# EAGLE board projekt (EAGLE 7.7.0)
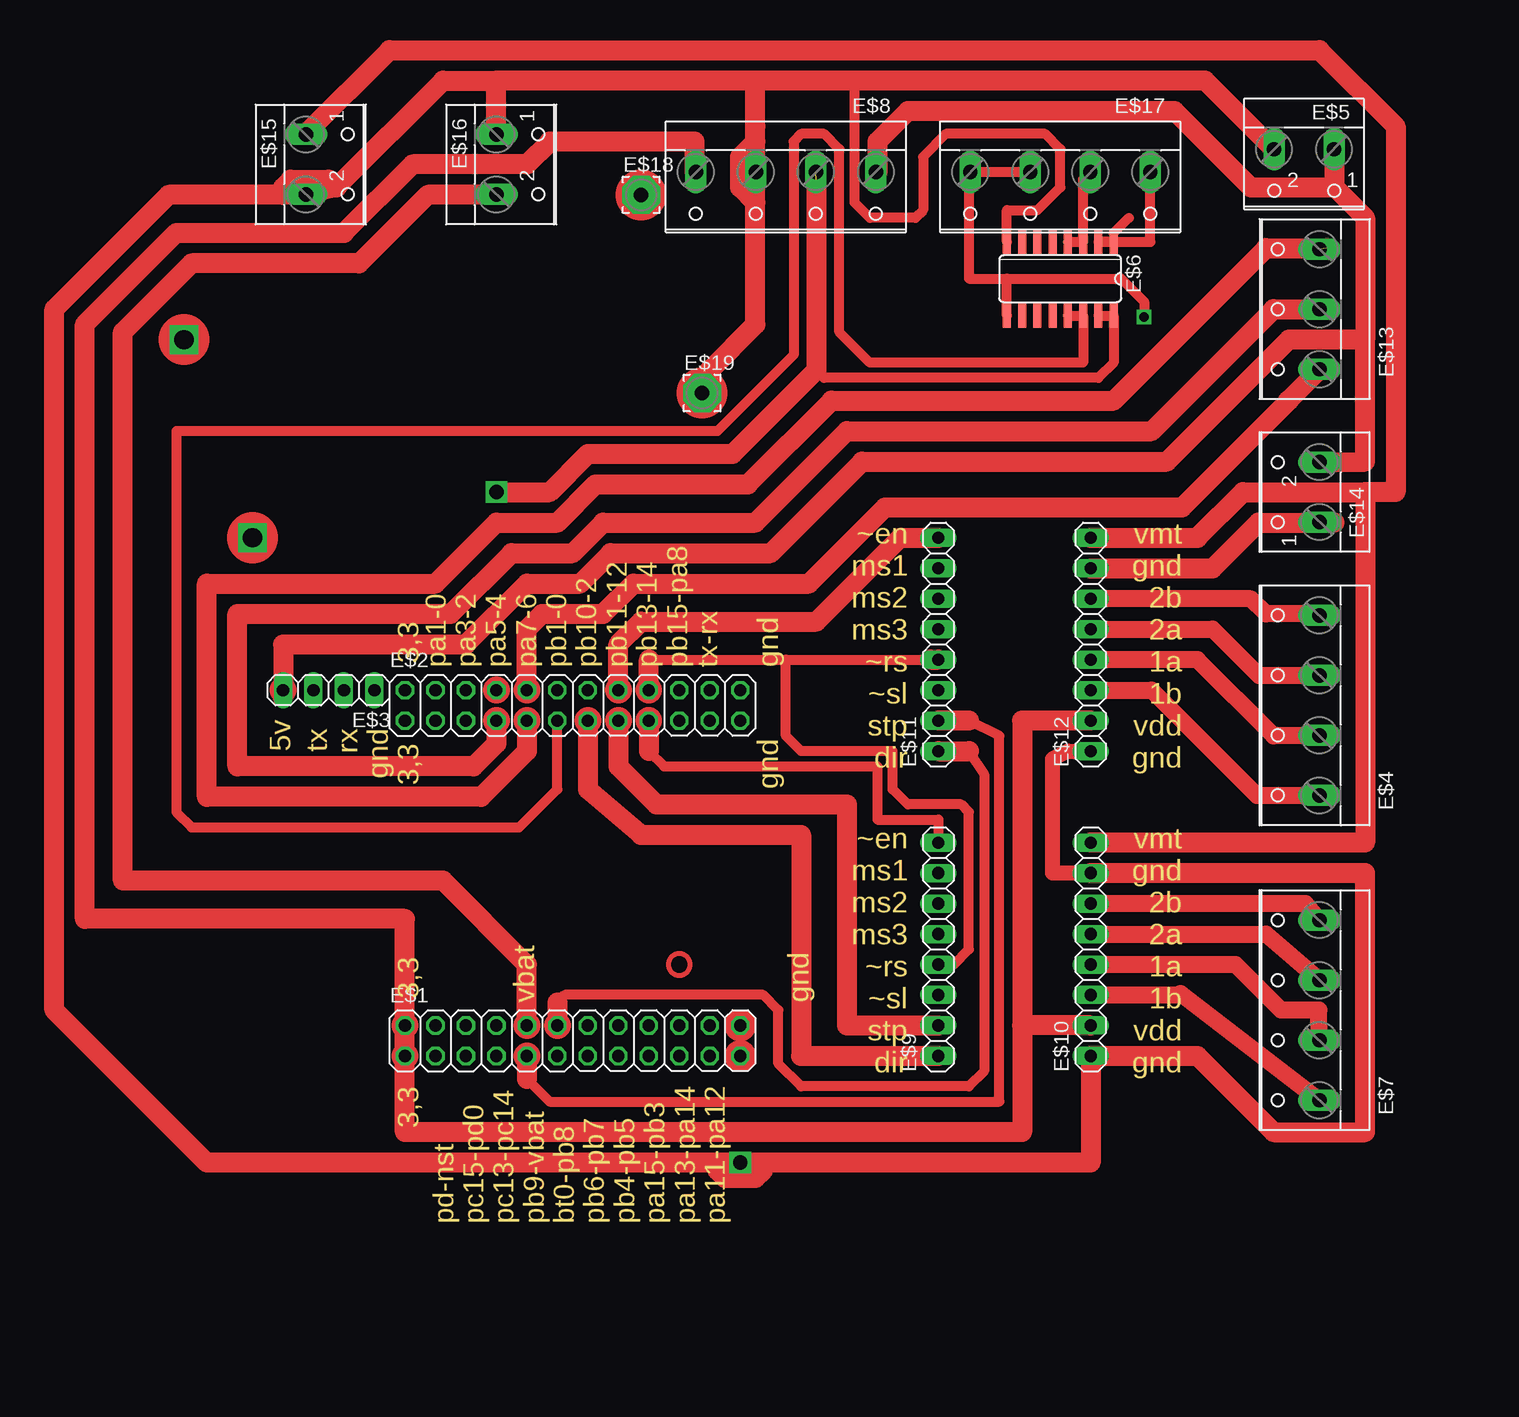
[diagram p0: board, top side]
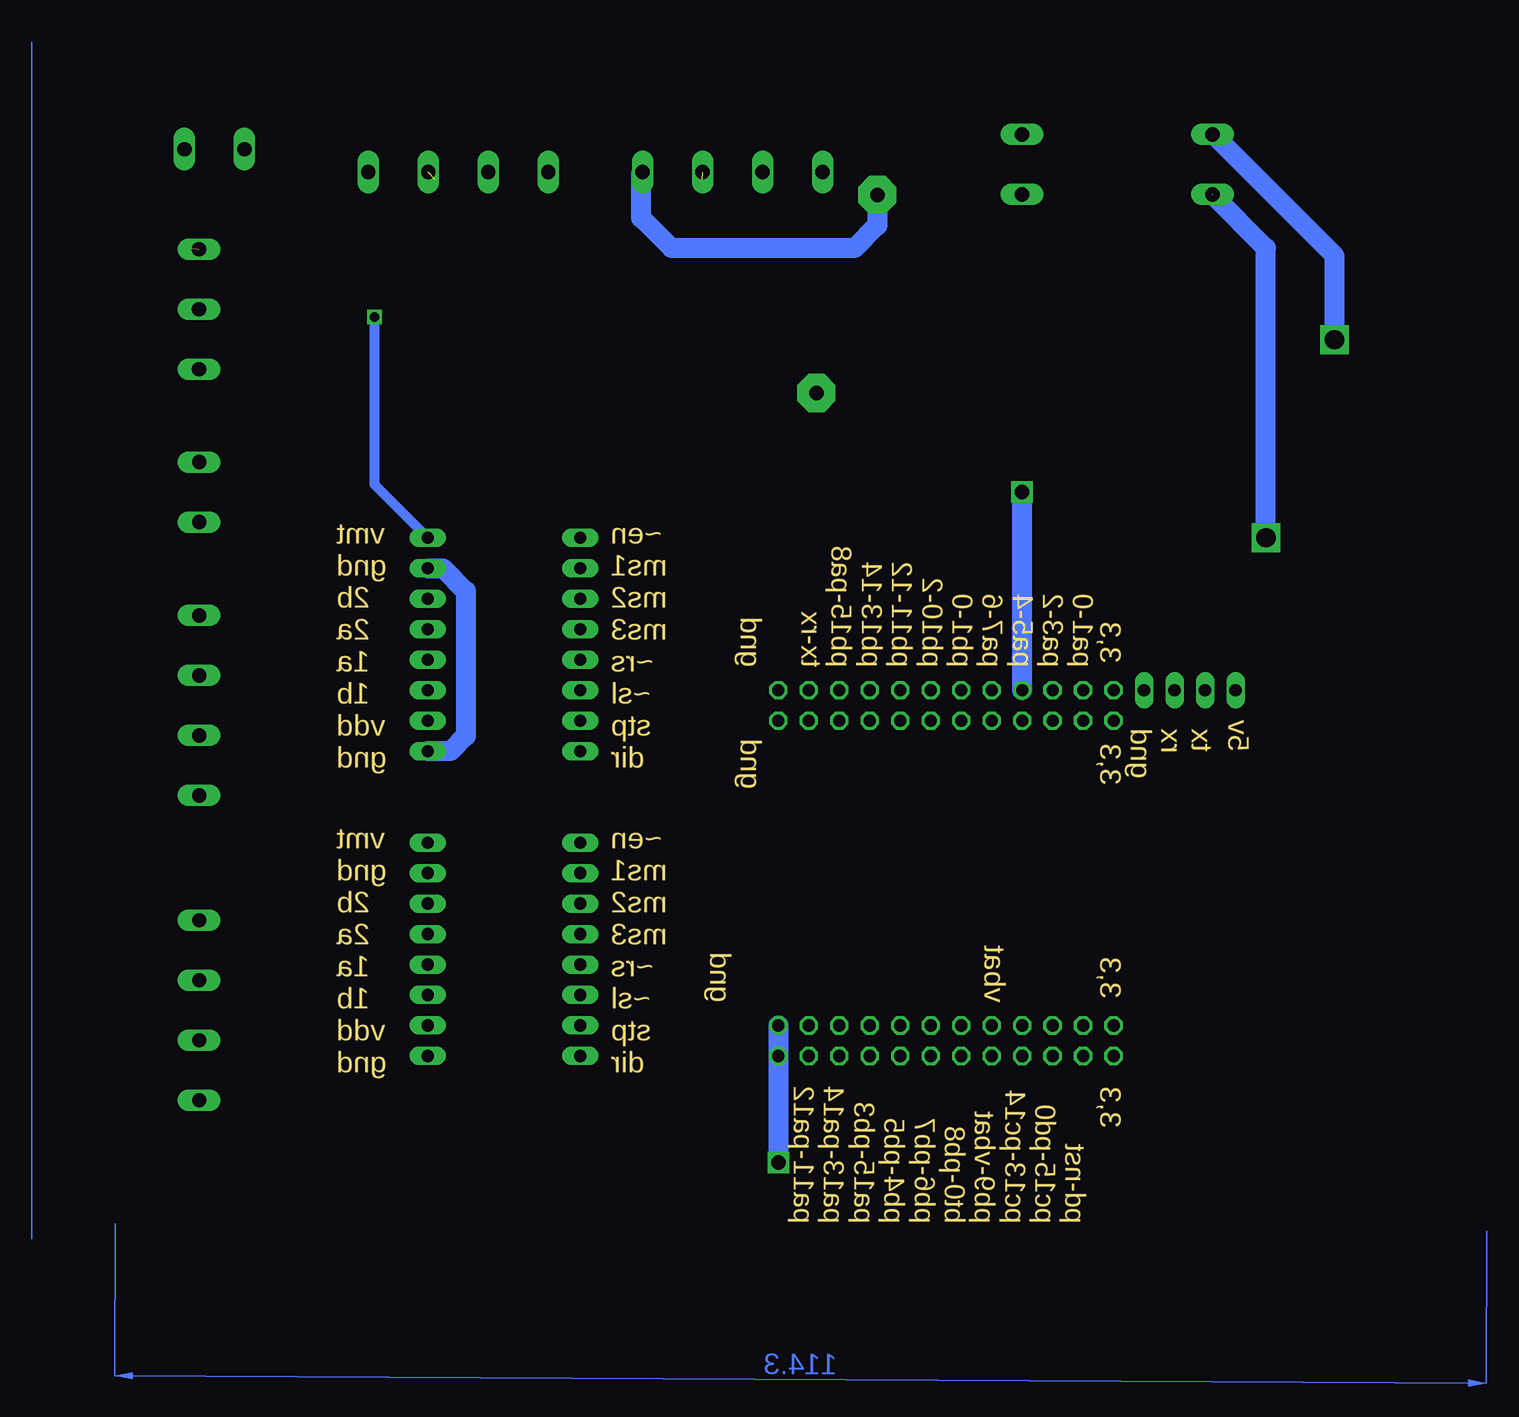
[diagram p1: board, bottom side, seen from below]

No outline drawn. Coordinates in mm, seen from the top.
Copper layers (1*16): Top 0.035mm / dielectric 1.5mm / Bottom 0.035mm
Design rules "default": minimum track width 10mil, minimum drill 24mil, track to track 8mil, track to pad 8mil, pad to pad 8mil, via to via 8mil, smd to smd 8mil, copper to edge 40mil, drill to drill 8mil, minimum pad ring 10mil, minimum via ring 8mil, stop-mask expansion 4mil, vias tented up to drill 0mil, thermal gap 10mil

## Footprints (pad centres in the part's own frame; a part is rotated, then mirrored left to right if it is on the bottom)
2X12 = drill 1.016 octagon: 1 -13.97,-1.27; 2 -13.97,1.27; 3 -11.43,-1.27; 4 -11.43,1.27; 5 -8.89,-1.27; 6 -8.89,1.27; 7 -6.35,-1.27; 8 -6.35,1.27; 9 -3.81,-1.27; 10 -3.81,1.27; 11 -1.27,-1.27; 12 -1.27,1.27; 13 1.27,-1.27; 14 1.27,1.27; 15 3.81,-1.27; 16 3.81,1.27; 17 6.35,-1.27; 18 6.35,1.27; 19 8.89,-1.27; 20 8.89,1.27; 21 11.43,-1.27; 22 11.43,1.27; 23 13.97,-1.27; 24 13.97,1.27
1X04 = drill 1.016 long: 1 -3.81,0; 2 -1.27,0; 3 1.27,0; 4 3.81,0
W237-4 = drill 1.194 long: 1 -7.5,-1.27; 2 -2.5,-1.27; 3 2.5,-1.27; 4 7.5,-1.27
W237-102 = drill 1.194 long: 1 -2.5,-1.27; 2 2.5,-1.27
SO16 = smd 0.66 x 2.032: 1 -4.445,-3.073; 2 -3.175,-3.073; 3 -1.905,-3.073; 4 -0.635,-3.073; 5 0.635,-3.073; 6 1.905,-3.073; 7 3.175,-3.073; 8 4.445,-3.073; 9 4.445,3.073; 10 3.175,3.073; 11 1.905,3.073; 12 0.635,3.073; 13 -0.635,3.073; 14 -1.905,3.073; 15 -3.175,3.073; 16 -4.445,3.073
1X08 = drill 1.016 long: 1 -8.89,0; 2 -6.35,0; 3 -3.81,0; 4 -1.27,0; 5 1.27,0; 6 3.81,0; 7 6.35,0; 8 8.89,0
W237-103 = drill 1.194 long: 1 -5,-1.29; 2 0,-1.29; 3 5,-1.29
3,17/1,2 = drill 1.194 pad 3.175 octagon: 1 0,0

## Placement (x,y rotation side)
E$1  [2X12]  25.4,5.08 0 top
E$2  [2X12]  25.4,33.02 0 top
E$3  [1X04]  5.08,34.29 180 top
E$4  [W237-4]  86.36,33.02 90 top
E$5  [W237-102]  86.36,78.11 180 top
E$6  [SO16]  66.04,68.58 180 top
E$7  [W237-4]  86.36,7.62 90 top
E$8  [W237-4]  43.18,76.2 180 top
E$9  [1X08]  55.88,12.7 90 top
E$10  [1X08]  68.58,12.7 90 top
E$11  [1X08]  55.88,38.1 90 top
E$12  [1X08]  68.58,38.1 90 top
E$13  [W237-103]  86.36,66.04 90 top
E$14  [W237-102]  86.36,50.8 90 top
E$15  [W237-102]  4.45,78.11 270 top
E$16  [W237-102]  20.32,78.11 270 top
E$17  [W237-4]  66.04,76.2 180 top
E$18  [3,17/1,2]  31.11,75.56 0 top
E$19  [3,17/1,2]  36.2,59.05 0 top

## Library data of the parts
E$1-E$3 E$9-E$12 = pinhead
E$4 E$5 E$7 E$8 E$13-E$17 = con-wago-500
E$6 = 40xx
E$18 E$19 = wirepad

## Nets
5V: E$3.4 E$5.1 E$14.2
+12V: E$6.9 E$10.8 E$12.8 E$15.1 E$17.3 E$17.4
GND: E$1.23 E$1.24 E$5.2 E$6.8 E$8.3 E$10.1 E$10.7 E$12.1 E$12.7 E$14.1 E$15.2
LED: E$2.8 E$6.15 E$6.16 E$8.2
S$1: E$2.11 E$6.13 E$6.14
S$2: E$7.1 E$10.3
S$3: E$7.2 E$10.4
S$4: E$7.3 E$10.5
S$5: E$7.4 E$10.6
S$6: E$4.1 E$12.3
S$7: E$4.2 E$12.4
S$8: E$4.3 E$12.5
S$9: E$4.4 E$12.6
S$10: E$1.9 E$11.2
S$11: E$2.16 E$11.8
S$12: E$2.10 E$13.1
S$13: E$2.9 E$13.3
S$14: E$6.1 E$6.2 E$17.1
S$15: E$6.3 E$6.4 E$17.2
S$17: E$2.18 E$9.4 E$11.4
S$18: E$1.12 E$11.1
S$19: E$2.7 E$13.2
S$20: E$2.13 E$9.1
S$21: E$2.15 E$9.2
S$22: E$2.17 E$9.8
S$25: E$1.1 E$1.2 E$10.2 E$12.2
S$26: E$8.1 E$18.1
VBAT: E$1.10

## Tracks (layer width: path | path; a pad name or v marks a point on that pad's centre or on a via)
5V
  Top 1.676: 1.27,33.66 E$3.4 1.27,38.1 16.51,38.1 21.59,43.18 26.04,43.18 28.57,45.72 41.91,45.72 49.53,53.34 74.93,53.34 85.09,63.5 91.44,63.5 | E$14.2 91.44,53.34 91.44,63.5 | E$5.1 88.86,76.24 88.9,76.2 | 88.9,76.2 91.44,73.66 91.44,63.5 | 88.9,76.2 81.92,76.2 75.56,82.55 53.34,82.55 50.8,80.01 50.8,77.47
+12V  (via drill 0.5)
  Top 0.813: E$17.4 E$17.3 58.42,77.47 58.42,68.58 61.59,68.58 | E$6.9 61.59,68.58 | 61.59,68.58 71.12,68.58 73.03,66.67 v73.03,65.41
  Top 1.676: E$12.8 77.47,46.99 81.28,50.8 91.44,50.8 | 91.44,50.8 91.44,21.59 E$10.8 | E$15.1 3.17,80.64 10.16,87.63 87.63,87.63 93.98,81.28 93.98,50.8 91.44,50.8
  Bottom 0.813: v73.03,65.41 73.03,51.44 E$12.8
GND  (via drill 1.2)  (1 unrouted)
  Top 0.813: E$8.3 40.68,81.24 40.64,81.28 | E$6.8 61.59,74.3 64.14,74.3 66.04,76.2 66.04,79.38 64.77,80.64 56.52,80.64 54.61,78.74 54.61,74.3 53.98,73.66 50.16,73.66 48.9,74.93 48.9,85.09
  Top 1.27: E$10.7 65.41,19.05 65.41,28.57 66.67,29.21 E$12.1
  Top 1.676: E$15.2 5.75,76.24 14.61,85.09 19.05,85.09 | 19.05,80.64 19.05,85.09 | 88.9,48.26 87.67,48.26 | 87.67,48.26 E$14.1 | 87.67,48.26 82.55,48.26 78.74,44.45 E$12.7 | E$5.2 83.82,79.38 78.11,85.09 48.9,85.09 40.64,85.09 | 40.64,85.09 19.05,85.09 | 40.64,85.09 40.64,81.28 40.64,80.01 | E$10.7 91.44,19.05 91.44,-2.54 83.82,-2.54 77.47,3.81 E$10.1 68.58,-5.08 v39.37,-5.08 -5.08,-5.08 -17.78,7.62 -17.78,66.04 -8.26,75.56 1.27,75.56 | 3.17,75.56 1.27,75.56 | 35.56,58.42 36.83,58.42 36.83,60.96 40.64,64.77 40.64,74.93 | 40.64,74.93 40.64,80.01 | 1.27,75.56 1.27,76.2 1.91,76.83 5.08,76.83 5.71,76.2 | 40.64,74.93 39.37,76.2 39.37,78.74 40.64,80.01
  Bottom 1.676: E$12.7 67.31,44.45 65.41,42.55 65.41,30.48 66.67,29.21 E$12.1 | E$1.23 E$1.24 v39.37,-5.08
LED  (via drill 1.2)  (1 unrouted)
  Top 0.813: E$6.15 E$6.16 70.48,61.59 69.22,60.33 46.35,60.33 45.72,60.96
  Top 1.676: v19.05,50.8 23.5,50.8 26.67,53.98 38.73,53.98 45.72,60.96 45.72,76.83
  Bottom 1.676: E$2.8 v19.05,50.8
S$1
  Top 0.813: E$6.13 E$6.14 67.94,61.59 50.16,61.59 47.62,64.14 47.62,79.38 46.35,80.64 44.45,80.64 43.81,80.01 43.81,62.23 37.47,55.88 -7.62,55.88 -7.62,24.13 -6.35,22.86 20.95,22.86 24.13,26.04 E$2.11
S$2
  Top 1.422: E$10.3 76.2,8.89 76.08,9.01 E$7.1
S$3
  Top 1.422: E$7.2 87.59,7.62 84.45,7.62 80.64,11.43 E$10.4
S$4
  Top 1.422: E$10.5 83.19,13.97 87.67,10.12 E$7.3
S$5
  Top 1.422: E$7.4 86.48,16.51 E$10.6
S$6
  Top 1.422: E$12.3 73.66,34.29 82.43,25.52 E$4.1
S$7
  Top 1.422: E$4.2 87.59,30.48 83.82,30.48 77.47,36.83 E$12.4
S$8
  Top 1.422: E$12.5 78.74,39.37 82.59,35.52 E$4.3
S$9
  Top 1.422: E$4.4 87.51,40.64 83.19,40.64 81.92,41.91 E$12.6
S$10
  Top 0.813: 21.59,1.91 23.5,0 60.96,0 60.96,30.48 58.42,31.75
  Top 1.676: E$1.9 21.59,1.91 | 58.42,31.75 E$11.2
S$11
  Top 1.676: E$2.16 29.21,38.1 31.11,40.01 45.72,40.01 52.7,46.99 E$11.8
S$12
  Top 1.676: E$2.10 21.59,39.37 22.86,40.64 27.94,40.64 30.48,43.18 45.09,43.18 51.44,49.53 76.2,49.53 85.09,58.42 85.03,58.42 E$13.1
S$13  (1 unrouted)
  Top 1.676: E$2.9 21.59,29.21 17.78,25.4 -5.08,25.4 -5.08,43.18 13.97,43.18 19.05,48.26 24.13,48.26 27.3,51.44 40.01,51.44 46.99,58.42 70.48,58.42 83.19,71.12 88.27,71.12
S$14
  Top 0.813: E$6.1 E$6.2 73.54,71.65 E$17.1
S$15  (1 unrouted)
  Top 0.813: E$6.4 E$6.3 67.94,76.83
S$16
  Top 1.676: 37.47,-5.71 38.1,-6.35 40.64,-6.35 41.27,-5.71
S$17
  Top 0.813: E$9.4 57.15,11.43 58.42,12.7 58.42,24.13 57.78,24.77 53.34,24.77 52.07,26.04 52.07,29.21 44.45,29.21 43.18,30.48 43.18,36.83 | 31.75,36.83 43.18,36.83 | 43.18,36.83 E$11.4
  Top 1.676: 55.24,36.83 E$11.4 | E$2.18 31.75,36.83
S$18
  Top 0.813: 58.42,29.21 59.69,27.3 59.69,2.54 58.42,1.27 44.45,1.27 42.55,3.17 42.55,7.62 41.27,8.89 24.77,8.89 24.13,8.26
  Top 1.676: E$11.1 58.42,29.21 | 24.13,8.26 E$1.12
S$19
  Top 1.676: E$2.7 19.05,29.84 17.14,27.94 -2.54,27.94 -2.54,40.64 15.24,40.64 20.32,45.72 25.4,45.72 27.94,48.26 40.64,48.26 48.26,55.88 73.66,55.88 83.82,66.04 E$13.2
S$20
  Top 1.676: E$2.13 26.67,26.04 31.11,22.23 44.45,22.23 44.45,3.81 E$9.1
S$21
  Top 1.676: E$2.15 29.21,27.94 32.38,24.77 48.26,24.77 48.26,6.35 E$9.2
S$22
  Top 0.813: 31.75,29.21 33.02,27.94 50.8,27.94 50.8,23.5 55.88,23.5 E$9.8
  Top 1.676: E$2.17 31.75,29.21
S$23
  Top 0.813: 70.48,72.39 71.75,73.66
S$24  (via drill 0.8)
  other vias: 73.03,65.41
S$25
  Top 1.676: 35.56,77.47 35.56,80.01 23.5,80.01 21.59,78.11 12.06,78.11 6.35,72.39 -7.62,72.39 -15.24,64.77 -15.24,15.24 11.43,15.24 E$1.2 E$1.1 11.43,-2.54 62.87,-2.54 62.87,6.35 | E$12.2 62.87,31.75 62.87,6.35 | E$10.2 62.87,6.35
S$26
  Bottom 1.676: E$18.1 31.11,73.03 33.02,71.12 48.26,71.12 50.8,73.66 50.8,77.35 E$8.1
S$27  (via drill 1.6)
  Bottom 1.676: v-6.99,63.5 -6.99,70.48 3.17,80.64
S$28  (via drill 1.6)
  Bottom 1.676: v-1.27,46.99 -1.27,71.12 3.17,75.56
VBAT
  Top 1.676: E$1.10 21.59,11.43 14.61,18.41 -12.06,18.41 -12.06,64.14 -6.35,69.85 7.62,69.85 13.34,75.56 19.05,75.56
(copper drawn outside any net)
  shapes: Bottom area x2, Top circle x22

## Text on the board
Dimension: ~en / ms1 / ms2 / ms3 / ~rs / ~sl / stp / dir | vmt / gnd / 2b / 2a / 1a / 1b / vdd / gnd | 3,3 | pa1-0 / pa3-2 / pa5-4 / pa7-6 / pb1-0 / pb10-2 / pb11-12 / pb13-14 / pb15-pa8 / tx-rx | gnd | tx | rx | gnd | 3,3 | 5v | gnd | ~en / ms1 / ms2 / ms3 / ~rs / ~sl / stp / dir | vmt / gnd / 2b / 2a / 1a / 1b / vdd / gnd | 3,3 | vbat | gnd | 3,3 | pd-nst / pc15-pd0 / pc13-pc14 / pb9-vbat / bt0-pb8 / pb6-pb7 / pb4-pb5 / pa15-pb3 / pa13-pa14 / pa11-pa12
tTest: gnd